# Altium PCB PCB1.PcbDoc
Units mm, origin at the board's own origin, x right, y up, seen from the top; angles counter-clockwise.
Board outline 60 x 45 mm, 2 copper layers (Top Layer, Bottom Layer), stack 1.569 mm thick; 42 components, 32 nets, 123 pads, 0 vias.
Unrouted connection lines stored in the file: 87.
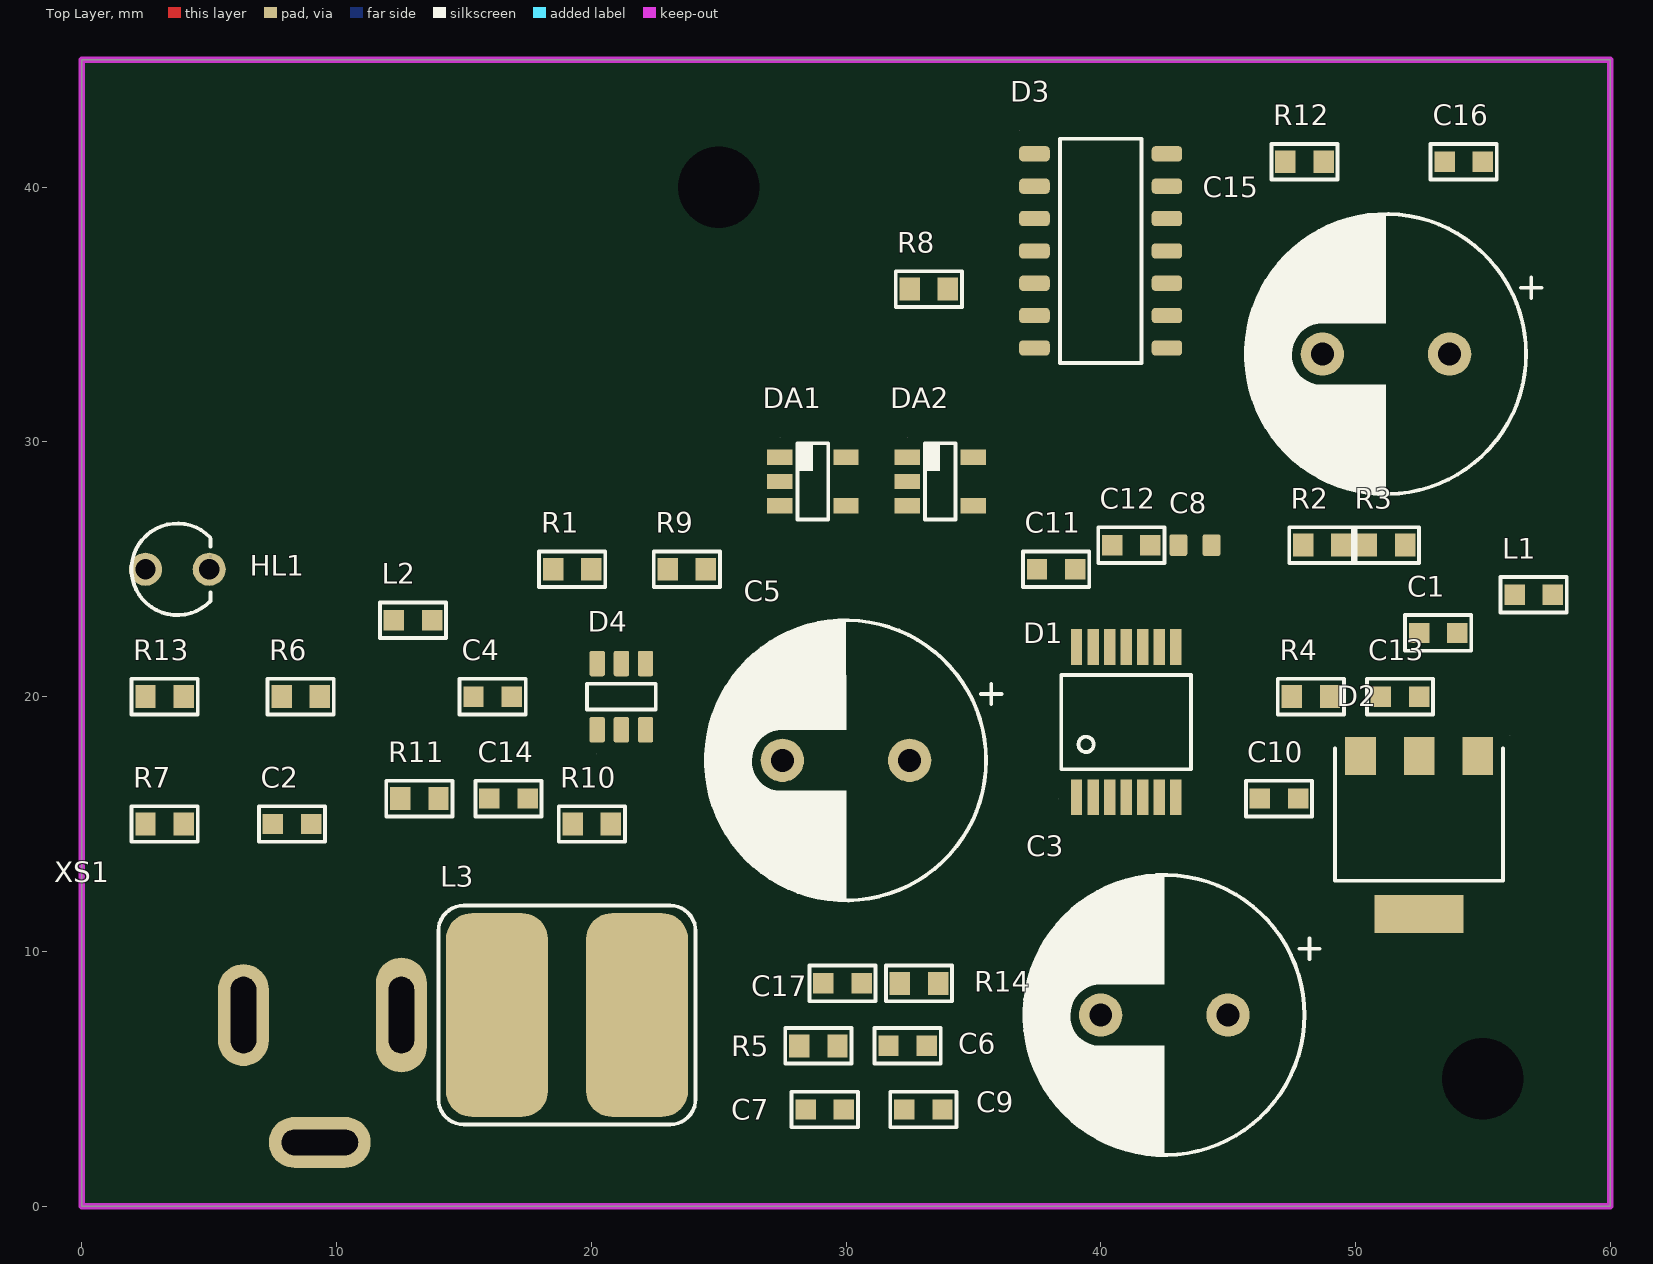
[diagram p0: Top Layer view]
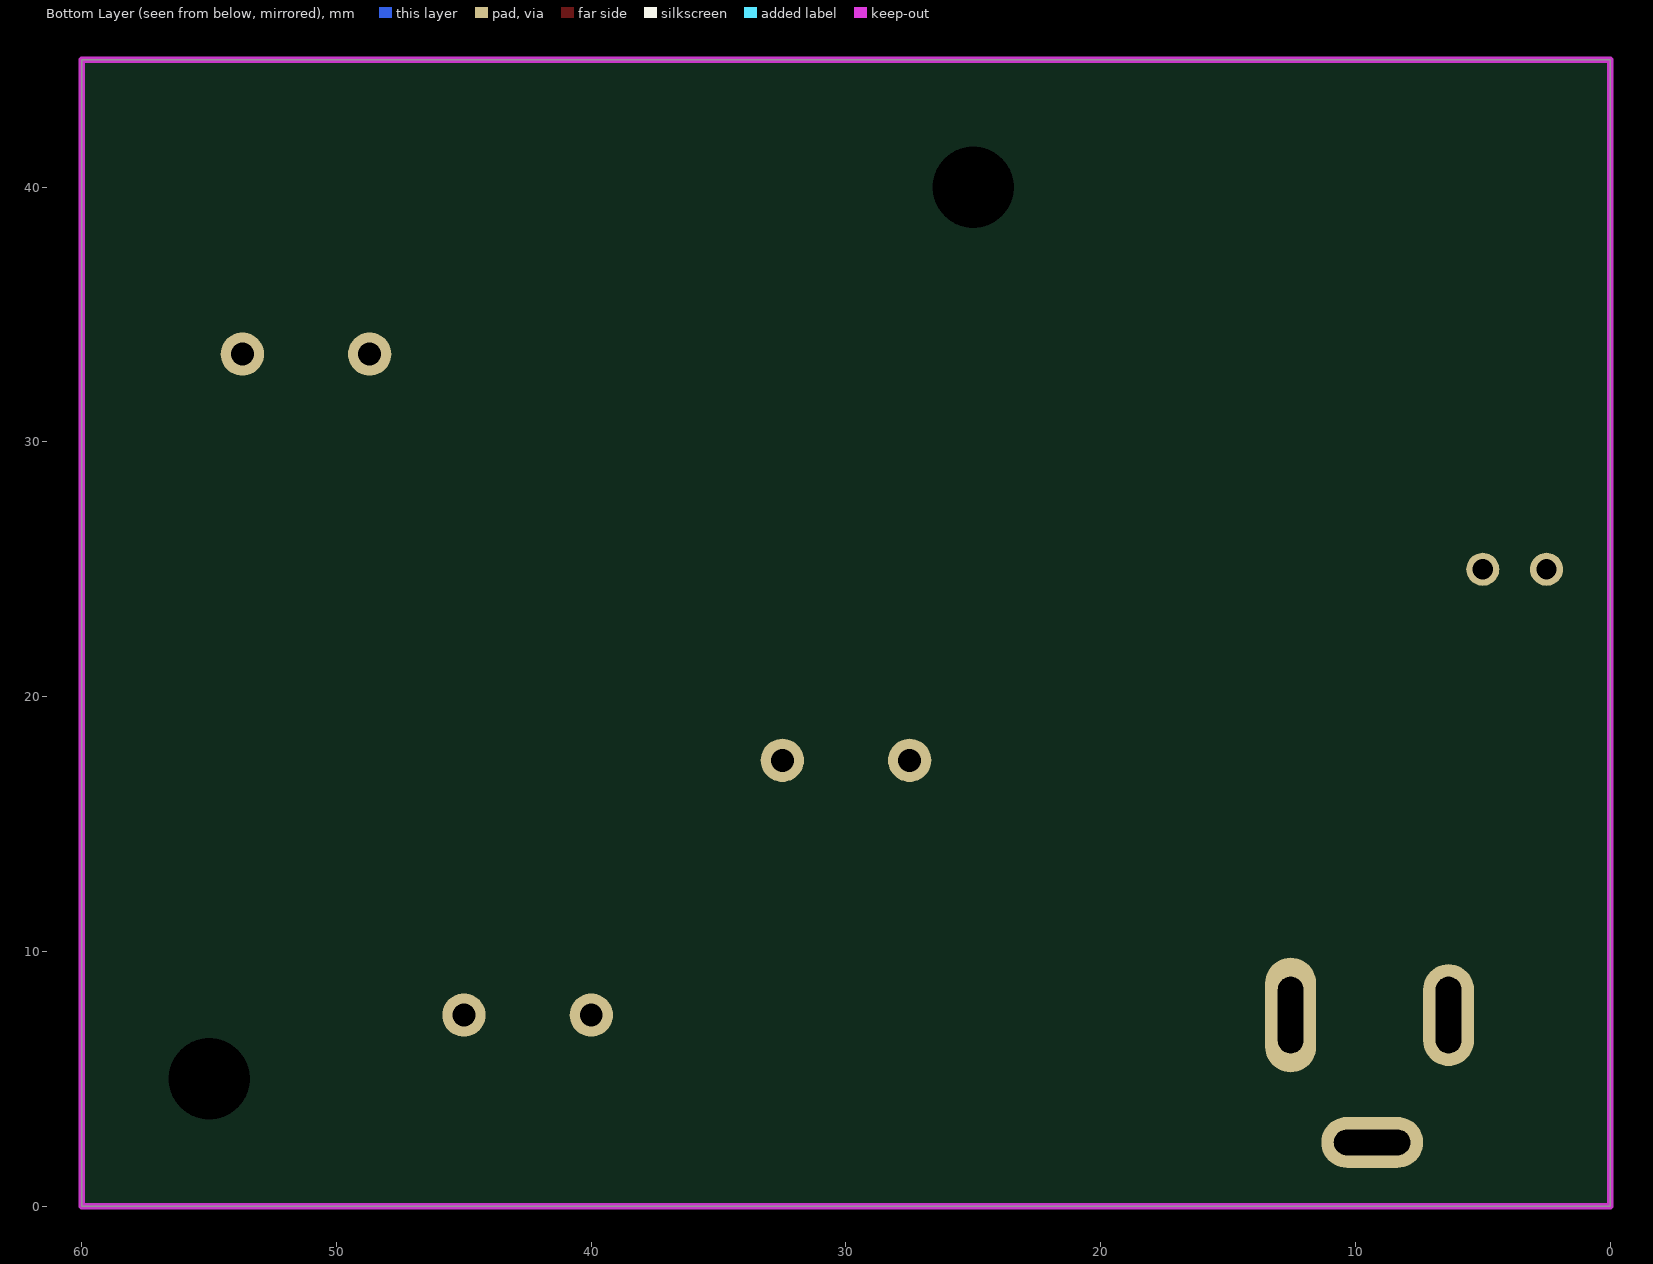
[diagram p1: Bottom Layer view, seen from below]

## Layer stack, top to bottom
Top Solder: solder mask 0.01, Solder Resist, Dk 3.5
Top Layer: signal copper 0.035
Dielectric 1: core 1.4986, Core-043, Dk 4.3
Bottom Layer: signal copper 0.035
Bottom Solder: solder mask 0.01, Solder Resist, Dk 3.5

## Board outline
0,0 0,45 60,45 60,0

## Design rules (kind name [scope] priority, off if disabled: settings)
Clearance [All] p1: gap=0.254 ignorepadtopadclearanceinfootprint=FALSE except(0: Arc-Hole Track-Hole SMDPad-Hole THPad-Hole Via-Hole Fill-Hole Poly-Hole Region-Hole Text-Hole)
PolygonConnect [All] p1: connectstyle=Relief reliefconductorwidth=0.254 reliefentries=4 polygonreliefangle="90 Angle" airgapwidth=0.254
RoutingVias [All] p1: holewidth=0.711 width=1.27 viastyle="Through Hole" minholewidth=0.711 minwidth=1.27 maxholewidth=0.711 maxwidth=1.27
SolderMaskExpansion [All] p1: expansion=0.102 istentingtop=FALSE
Width [All] p1: maxlimit=0.254 minlimit=0.254 preferedwidth=0.254
30 further rules are at their usual default settings.

## Components (designator, comment, footprint, x,y, rotation, side; value= is the part's Value field where it differs from the comment)
C1 "100" C_0603_(1608) 53.25,22.5 r0 top
C2 "100" C_0603_(1608) 8.25,15 r0 top
C3 "100" CP_D10_P5_L16 42.5,7.5 r0 top
C4 "100" C_0603_(1608) 16.126,20 r0 top
C5 "100" CP_D10_P5_L16 30,17.5 r0 top
C6 "100" C_0603_(1608) 32.416,6.291 r0 top
C7 "100" C_0603_(1608) 29.166,3.791 r0 top
C8 "100" CAPC1608X90N 43.7,25.95 r0 top
C9 "100" C_0603_(1608) 33.037,3.791 r0 top
C10 "100" C_0603_(1608) 47,16 r0 top
C11 "100" C_0603_(1608) 38.25,25 r0 top
C12 "100" C_0603_(1608) 41.2,25.95 r0 top
C13 "100" C_0603_(1608) 51.75,20 r0 top
C14 "100" C_0603_(1608) 16.75,16 r0 top
C15 "100" CP_D10_P5_L16 51.2,33.45 r0 top
C16 "100" C_0603_(1608) 54.25,41 r0 top
C17 "100" C_0603_(1608) 29.862,8.741 r0 top
D1 "Обозначение при заказе" TSSOP14 41,19 r90 top
D2 "Обозначение при заказе" SOT223 52.5,14.771 r180 top
D3 "Обозначение при заказе" SO-14 40,37.5 r0 top
D4 "Обозначение при заказе" SOT23-6 21.181,20 r90 top
DA1 "Обозначение при заказе" TSOT23-5L 28.7,28.45 r0 top
DA2 "Обозначение при заказе" TSOT23-5L 33.7,28.45 r0 top
HL1 "" ledrad3mm 3.748,25 r0 top
L1 "" C_0603_(1608) 57,24 r0 top
L2 "" C_0603_(1608) 13,23 r0 top
L3 "" SS0704 19.046,7.5 r90 top
R1 "CR 0402 4,7 кОм ±1%" R_0603_(1608) 19.25,25 r0 top
R2 "CR 0402 4,7 кОм ±1%" R_0603_(1608) 48.7,25.95 r0 top
R3 "CR 0402 4,7 кОм ±1%" R_0603_(1608) 51.2,25.95 r0 top
R4 "CR 0402 4,7 кОм ±1%" R_0603_(1608) 48.25,20 r0 top
R5 "CR 0402 4,7 кОм ±1%" R_0603_(1608) 28.916,6.291 r0 top
R6 "CR 0402 4,7 кОм ±1%" R_0603_(1608) 8.592,20 r0 top
R7 "CR 0402 4,7 кОм ±1%" R_0603_(1608) 3.25,15 r0 top
R8 "CR 0402 4,7 кОм ±1%" R_0603_(1608) 33.25,36 r0 top
R9 "CR 0402 4,7 кОм ±1%" R_0603_(1608) 23.75,25 r0 top
R10 "CR 0402 4,7 кОм ±1%" R_0603_(1608) 20.021,15 r0 top
R11 "CR 0402 4,7 кОм ±1%" R_0603_(1608) 13.25,16 r0 top
R12 "CR 0402 4,7 кОм ±1%" R_0603_(1608) 48,41 r0 top
R13 "CR 0402 4,7 кОм ±1%" R_0603_(1608) 3.25,20 r0 top
R14 "CR 0402 4,7 кОм ±1%" R_0603_(1608) 32.866,8.741 r0 top
XS1 "HYR-0142AR" KLD-0202 -1.158,7.5 r0 top

## Footprints (in the part's own frame and the unit in brackets; to place one, negate y for a bottom-side part, rotate by r counter-clockwise, add the part's x,y. Pads: shape width x height; smd on the part's side, far side on the other; paste and mask are expansions set on the pad)
C_0603_(1608) [mm]
  rect 0.8x0.8 smd: 1(-0.75,0) 2(0.75,0)
  silkscreen extent -1.3,-0.7 1.3,0.7, body extent -0.8,-0.4 0.8,0.4, height 0.97
CAPC1608X90N [mm] "Capacitor,non-polarized,Chip;1.60mm L X 0.8mm W X 0.90mm H"
  rrect25% 0.7x0.85 smd: 1(-0.65,0) 2(0.65,0)
  body extent -0.85,-0.45 0.85,0.45, height 0.9
CP_D10_P5_L16 [mm]
  round 1.7 hole 0.9: 1(2.5,0) 2(-2.5,0)
  silkscreen extent -5.5,-5.5 6.1,5.5, body extent -5,-5 5,5, height 16.1
KLD-0202 [mm] "DC Power Jack, 2.5mm, KLD Series, PCB Mount"
  oval 2x4.5 hole 1 slot 3 at 90 deg: 1(13.7,0)
  oval 2x4 hole 1 slot 3 at 90 deg: 2(7.5,0)
  oval 4x2 hole 1 slot 3 at 0 deg: 3(10.5,-5)
  body extent 0.19,-4.92 14.82,4.48, height 11
ledrad3mm [mm]
  round 1.3 hole 0.8: 1(-1.252,0) 2(1.252,0)
  silkscreen extent -1.8,-1.8 1.3,1.8, body extent -2.01,-2 1.5,2, height 15.5
R_0603_(1608) [mm]
  rect 0.8x0.9 smd: 1(-0.75,0) 2(0.75,0)
  silkscreen extent -1.3,-0.7 1.3,0.7, body extent -0.7,-0.41 0.7,0.41, height 0.45
SO-14 [mm] "SOIC, 14-Leads, Body 8,65x3,90mm, Pitch 1,27mm, IPC Medium Density"
  rrect50% 1.2x0.6 smd: 1(-2.6,3.81) 2(-2.6,2.54) 3(-2.6,1.27) 4(-2.6,0) 5(-2.6,-1.27) 6(-2.6,-2.54) 7(-2.6,-3.81) 8(2.6,-3.81) 9(2.6,-2.54) 10(2.6,-1.27) 11(2.6,0) 12(2.6,1.27) 13(2.6,2.54) 14(2.6,3.81)
  silkscreen extent -1.6,-4.4 1.6,4.4, body extent -3,-4.4 3,4.4, height 1.75
SOT23-6 [mm]
  rrect25% 1x0.6 smd: 1(-1.3,0.95) 2(-1.3,0) 3(-1.3,-0.95) 4(1.3,-0.95) 5(1.3,0) 6(1.3,0.95)
  silkscreen extent -0.51,-1.35 0.51,1.35, body extent -1.4,-1.45 1.4,1.45, height 1.44
SOT223 [mm]
  rect 1.2x1.5 smd: 1(-2.3,-2.9) 2(0,-2.9) 3(2.3,-2.9)
  rect 3.5x1.5 smd: 2(0,3.3)
  silkscreen extent -3.3,-3.2 3.3,2, body extent -3.25,-3.4 3.25,3.6, height 1.64
SS0704 [mm]
  rrect50% 8x4 smd: 1(0,2.75) 2(0,-2.75)
  silkscreen extent -4.3,-5.05 4.3,5.05, body extent -3.77,-3.7 3.73,3.8, height 4
TSOT23-5L [mm] "SOT23, 5-Leads, Body 2,95x2,65mm, Pitch 0,95mm, IPC Medium Density"
  rect 1x0.6 smd: 1(-1.3,0.95) 2(-1.3,0) 3(-1.3,-0.95) 4(1.3,-0.95) 5(1.3,0.95)
  silkscreen extent -0.6,-1.5 0.6,1.5, body extent -1.4,-1.5 1.4,1.5, height 1.1
TSSOP14 [mm] "TSOP, 14-Leads, Body 5,00x4,40mm, Pitch 0,65mm, IPC Medium Density"
  rect 1.4x0.45 smd: 1(-2.95,1.95) 2(-2.95,1.3) 3(-2.95,0.65) 4(-2.95,0) 5(-2.95,-0.65) 6(-2.95,-1.3) 7(-2.95,-1.95) 8(2.95,-1.95) 9(2.95,-1.3) 10(2.95,-0.65) 11(2.95,0) 12(2.95,0.65) 13(2.95,1.3) 14(2.95,1.95)
  silkscreen extent -1.85,-2.55 1.85,2.55

## Part data
C1 C2 C3 C4 C5 C6 C7 C8 C9 C10 C11 C12 C13 C14 C15 C16 C17: library part GRM188R71H104KA93#, "Non-polarised capacitor", Manufacturer=MURATA, ManufacturerCountry=США, ValueSCH=0,1мк, Analog=(null), ComponentLink1Description="Manufacturer Link", ComponentLink1URL=www.murata.com, ComponentLink2Description="Datasheet Link", ComponentLink2URL=http://www.murata.com/products/catalog/pdf/c02e.pdf, Group=C, Name="GRM 0603 0,1 мкФ ±10% 50В X7R", Part Number=GRM188R71H104KA93#, PCB_Layout=SMT, Pin Count=2, Status=Разрешен, Наименование=Конденсатор, Обозначение=(null), Раздел="Прочие изделия"
D1: library part SN74HC4066, "Описание свойств компонента"
D2: library part LD1117S50TR, "Описание свойств компонента"
D3: library part PCM1808, "Описание свойств компонента"
D4: library part MT1470, "Описание свойств компонента"
DA1 DA2: library part TLV6741, "Описание свойств компонента"
HL1: library part LED
L1 L2 L3: library part Inductor
R1 R2 R3 R4 R5 R6 R7 R8 R9 R10 R11 R12 R13 R14: library part CR0402-FX-4701G, Manufacturer=Bourns, ManufacturerCountry=США, Analog=(null), ComponentLink1Description="Manufacturer Link", ComponentLink1URL=www.bourns.com, ComponentLink2Description="Datasheet Link", ComponentLink2URL=http://www.bourns.com/data/global/pdfs/CR0402.pdf, Group=R, Name="CR 0402 4,7 кОм ±1%", Part Number=CR0402-FX-4701G, PCB_Layout=SMT, Pin Count=2, Status=Разрешен, Наименование=Резистор, Обозначение=(null), Раздел="Прочие изделия"
XS1: library part XS2, "HYR-0142AR (GB-142AR) (BNC-7044), Разъем BNC, гнездо угловое, на плату"

## Free pads (board coordinates)
  round 3 hole 3.2 unplated: MTH1(55,5) MTH2(25,40)

## Nets (pads, with @x,y where several pads share a name; then routed paths per layer and width w, separated by ;. In a path a pad name is that pad's centre, name@x,y a point inside that pad or via, vN(x,y) a via of type N, cw(c..) or ccw(c..) an arc to the next point about the centre after c; other vN are vias at no path point)
+3.3V: C15.2 C16.2 L3.2 R11.2
+5VA: C1.2 C4.2 C9.2 C10.2 C13.2 D1.14 D2.2 D3.3 D3.4 DA1.4 DA2.4
GAIN_1: D1.13
GAIN_10: D1.5
GAIN_100: D1.6
GAIN_1000: D1.12
GND: C1.1 C3.1 C4.1 C5.1 C6.1 C7.1 C9.1 C10.1 C11.1 C12.1 C13.1 C15.1 C16.1 C17.1 D1.7 D2.1 D3.2 D3.5 D3.10 D3.11 D3.12 D4.1 DA1.2 DA2.2 HL1.1 R5.2 R12.1 R14.1 XS1.1
NetC2_1: C2.1 DA1.3 R2.2 R3.1
NetC2_2: C2.2 DA1.5 R3.2 R4.1
NetC3_2: C3.2 D4.3 L1.2 L2.1 R10.2
NetC5_2: C5.2 C6.2 C7.2 D2.3 L2.2
NetC8_1: C8.1 D1.1 D1.4 D1.8 D1.11 DA2.3
NetC8_2: C8.2 D1.10 DA2.5 R8.1 R9.1
NetC11_2: C11.2 D3.14 R9.2
NetC14_1: C14.1 D4.6
NetC14_2: C14.2 D4.2 L3.1
NetC17_2: C17.2 R14.2
NetD1_2: D1.2 R5.1 R6.2
NetD1_3: D1.3 R6.1 R7.2
NetD1_9: D1.9 R7.1 R8.2
NetD3_6: D3.6
NetD3_7: D3.7
NetD3_8: D3.8
NetD3_9: D3.9
NetD4_4: D4.4 R11.1 R12.2
NetD4_5: D4.5 R10.1
NetD5_8: R13.2
NetDA1_1: DA1.1 R1.1
NetDA2_1: DA2.1 R4.2
NetHL1_2: HL1.2 R13.1
NetL1_1: L1.1 XS1.2
VREF: C12.2 D3.1 R1.2 R2.1
pads on no net: D3.13 XS1.3

## Keep-outs
Keep-Out Layer:
  the board outline again, w0.254

## Silkscreen, mask and mechanical layers (free items; w line width, h text height)
Board Outline:
  lines w0.254: 0,0 60,0 60,45 15,45 0,45 0,0